# Altium PCB AIMLAB_TESTSTATION_ADC_V1.PcbDoc (part 2 of 4)
Units mm, origin at the board's own origin, x right, y up, seen from the top; angles counter-clockwise.
Board outline 175.7 x 83.5 mm, 6 copper layers (Top Layer, MidLayer1, MidLayer2, MidLayer3, MidLayer4, Bottom Layer), stack 1.507 mm thick; 326 components, 348 nets, 1330 pads, 153 vias.
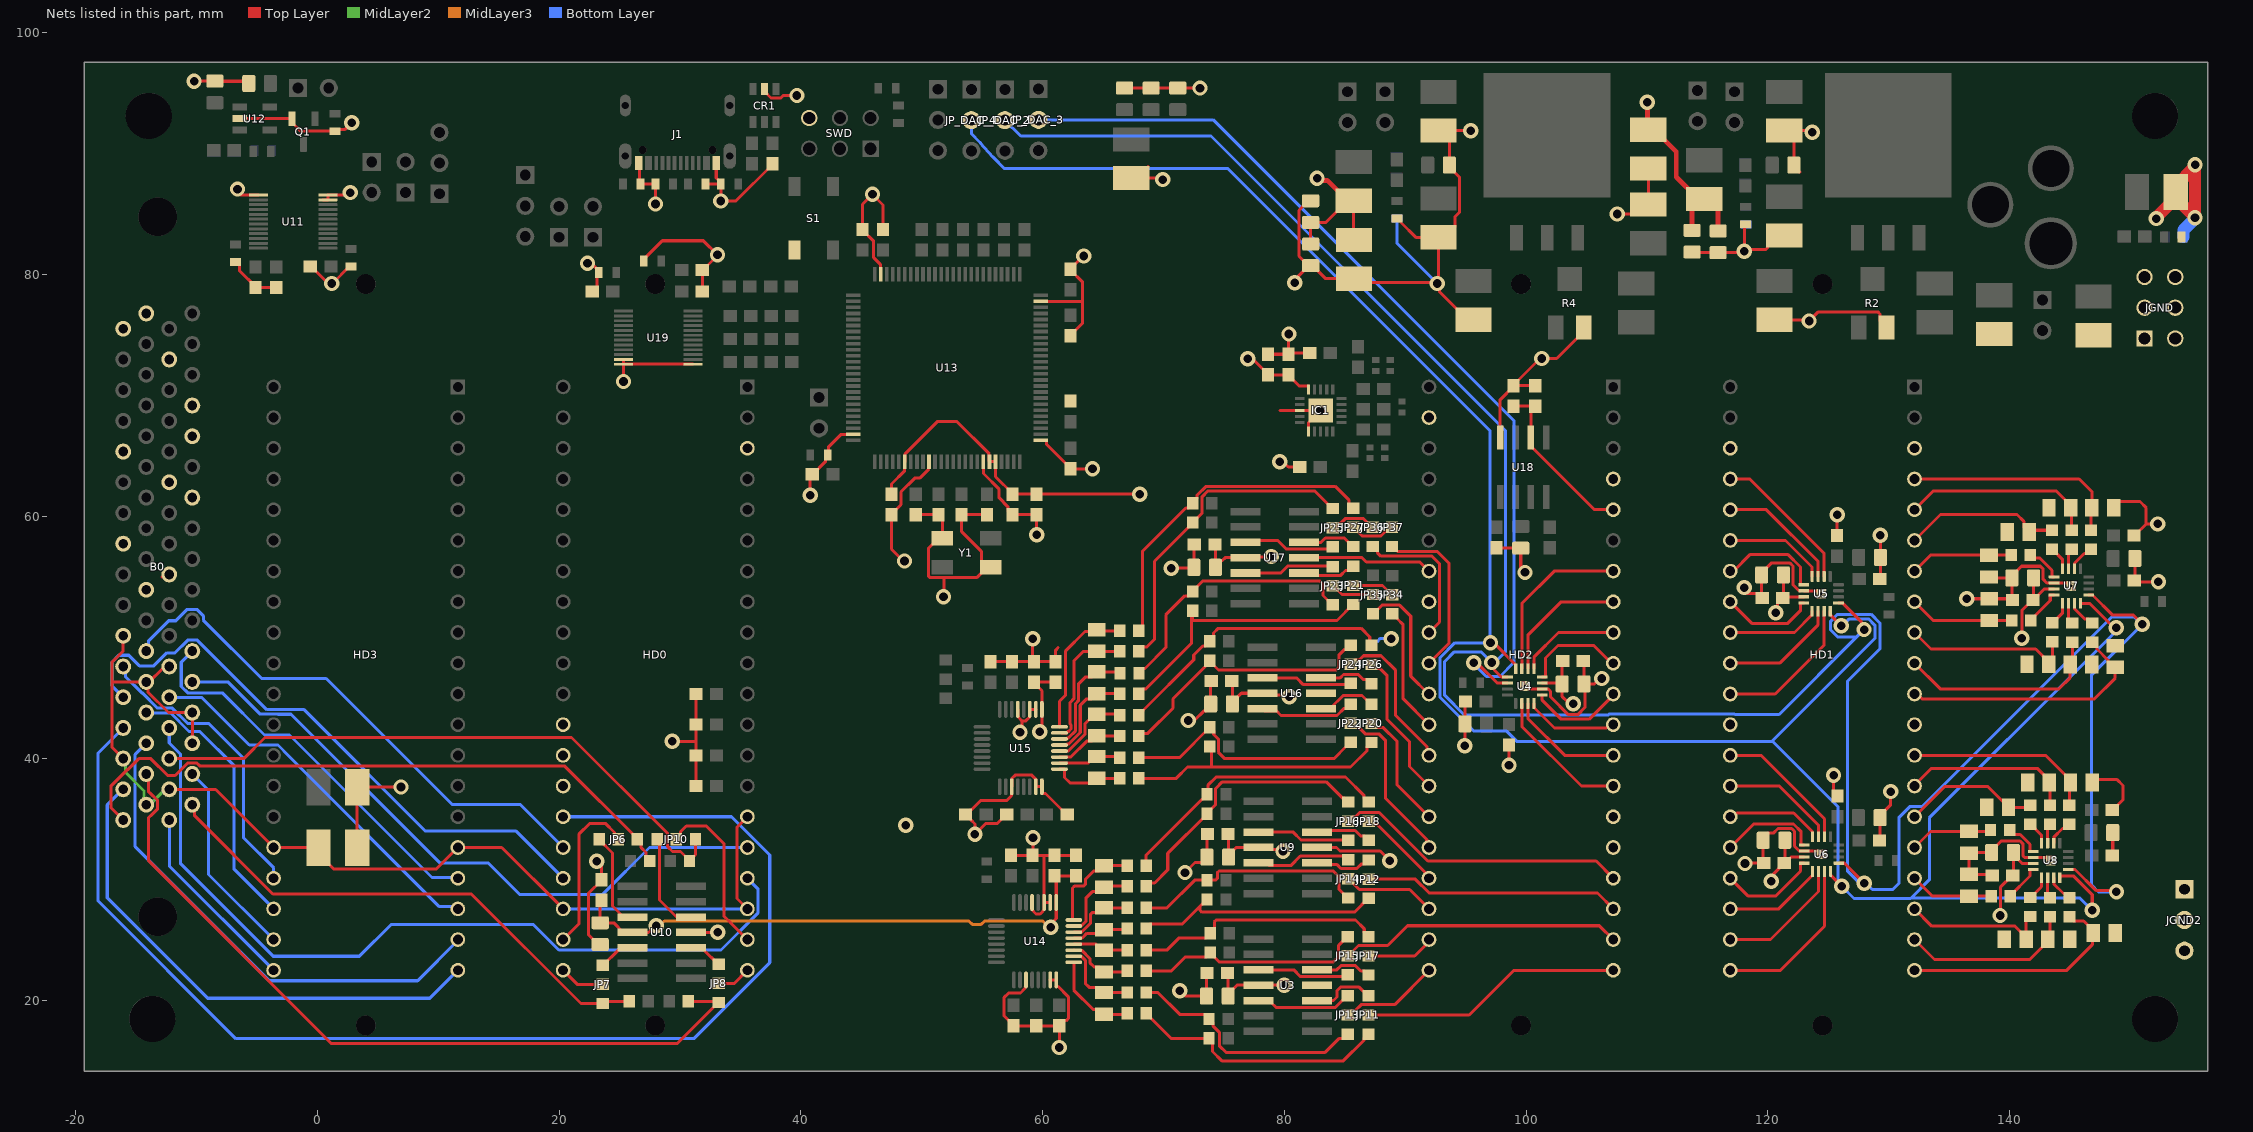
[diagram p6: the nets of this part, all layers, seen from the top]

## Via types
v1: diameter 1.27, hole 0.711, Top Layer to Bottom Layer, 153 vias

## Nets (pads, with @x,y where several pads share a name; then routed paths per layer and width w, separated by ;. In a path a pad name is that pad's centre, name@x,y a point inside that pad or via, vN(x,y) a via of type N, cw(c..) or ccw(c..) an arc to the next point about the centre after c; other vN are vias at no path point) (continued)
AGND: B0.4 B0.7 B0.9 B0.12 B0.13 B0.18 B0.35 B0.36 B0.44 B0.50 B0.53 C0.2 C1.2 C2.2 C3.2 C4.2 C5.2 C6.2 C7.2 C8.2 C9.2 C10.1 C11.2 C12.2 C13.2 C14.2 C15.1 C16.1 C17.2 C18.2 C19.2 C20.1 C21.1 C22.2 C23.2 C24.1 C25.1 C26.2 C27.2 C28.1 C29.1 C30.2 C31.2 C32.1 C33.1 C34.2 C35.2 C36.1 C37.1 C38.2 C39.2 C40.1 C41.1 C42.1 C43.1 C44.2 C45.2 C46.1 C47.1 C48.2 C49.2 C50.1 C51.1 C52.1 C53.1 C54.1 C55.2 C56.2 C57.2 C60.2 C61.1 C62.1 C63.1 C64.1 C65.1 C66.1 C67.1 C68.1 C69.1 C70.1 C71.1 C72.1 C75.2 C76.2 C77.1 C78.2 C79.2 C81.1 C82.1 C83.1 C84.1 C85.1 C86.1 C87.1 C88.1 C92.2 C93.1 C94.2 C95.2 C96.1 C97.1 C98.1 C99.1 C100.1 C101.1 C102.1 C103.1 C104.1 C105.2 C106.2 C107.2 C108.2 C109.1 C110.1 C111.2 C112.1 C113.1 C114.2 C115.2 C116.2 C117.1 C118.1 C119.1 C121.2 C122.2 C127.2 C128.1 C129.1 CR1.2 HD0.5 HD0.24 HD0.26 HD0.28 HD1.5 HD1.6 HD1.23 HD1.24 HD2.4 HD2.14 HD2.16 HD2.29 HD2.31 IC1.3 IC1.6 IC1.21 J1.A1_B12 J1.B1_A12 JGND2.1 JGND2.2 JGND2.3 JGND.1 JGND.2 JGND.3 JGND.4 JGND.5 JGND.6 L4.1 L5.1 L6.2 Q1.2 R2.3 R4.3 R5.1 R6.1 R7.2 R8.1 R10.1 R45.2 R62.1 R63.1 R64.2 R65.1 R80.2 R92.2 R93.2 R94.2 R95.2 R100.2 R101.2 R102.1 R103.1 R104.1 S1.4 SWD.6 U3.11 U4.6 U4.17 U4.18 U5.6 U5.17 U5.18 U6.6 U6.17 U6.18 U7.6 U7.17 U7.18 U8. U8.6 U8.17 U9.11 U10.11 U11.11 U11.12 U11.13 U12.2 U13.10 U13.19 U13.26 U13.49 U13.74 U13.99 U14.10 U14.11 U14.13 U14.27 U14.31 U14.32 U15.10 U15.11 U15.13 U15.27 U15.31 U15.32 U16.11 U17.11 U18.4 U19.11 U19.12 U19.13 Y1.2 Y1.4 | length 508.5
  Top Layer w0.25: B0.53@-14.152,53.945 B0.53@-13.93,53.945 ; B0.18@-12.865,55.01 -12.452,55.01 B0.18@-12.247,55.215 ; R101.2@-6.775,81.05 -6.65,81.05 -6.45,80.85 -6.45,80.35 -5.1,79 C51.1@-5.1,78.95 ; C52.1@-0.525,80.7 0.605,79.57 0.629,79.57 0.924,79.275 1.25,79.275 2.65,80.675 R7.2@2.775,80.675 ; L4.1@3.3,32.6 L5.1@3.3,37.6 3.325,37.625 v1(6.925,37.625) ; v1(23.125,31.475) 23.5,31.1 C49.2@23.5,29.95 23.5,29.9 22.438,28.838 22.438,25.397 23.23,24.605 C48.2@23.4,24.605 ; v1(25.33,71.17) U19.12@25.33,72.6 ; U19.11@25.33,73 U19.12@25.33,72.6 ; J1.B1_A12@26.6,89.25 26.662,89.187 26.662,87.563 R65.1@26.725,87.5 R64.2@27.975,87.5 v1(27.975,85.85) ; v1(29.35,41.4) 31.325,41.4 ; U10.11@30.964,25.6 v1(33.125,25.6) ; U19.13@31.07,72.6 U19.12@25.33,72.6 ; R95.2@31.325,37.705 R94.2@31.325,40.245 31.325,41.4 ; R92.2@31.325,45.325 R93.2@31.325,42.785 31.325,41.4 ; R62.1@32.125,87.5 R63.1@33.375,87.5 ; J1.A1_B12@33,89.25 33,88 33.375,87.625 R63.1@33.375,87.5 ; C129.1@37.65,89.175 37.65,89.125 34.625,86.1 v1(33.375,86.1) R63.1@33.375,87.5 ; v1(40.775,61.775) 40.775,63.325 C100.1@40.95,63.5 ; C100.1@41,63.5 42.025,64.525 42.025,64.9 R45.2@42.225,65.1 42.304,65.179 42.304,65.779 43.298,66.773 44.323,66.773 U13.99@44.35,66.8 ; C92.2@47.5,60.15 47.5,57.3 48.475,56.325 v1(48.575,56.325) ; C92.2@47.5,60.2 48.283,60.983 48.283,62.039 49.42,63.177 49.832,63.177 50.573,63.917 U13.10@50.573,64.967 ; C96.1@49.5,60.1 C96.1@49.5,60.15 C103.1@51.4,60.15 51.7,59.85 Y1.4@51.7,58.2 51.4,58.2 50.548,57.348 50.548,55.096 50.696,54.948 51.825,54.948 ; v1(51.8,53.375) 51.825,53.4 51.825,54.948 ; v1@54.512,33.613 v1(54.4,33.725) ; U13.19@55.1,64.55 55.1,63.556 56.4,62.256 56.4,61.544 57.125,60.819 57.125,60.525 C101.1@57.5,60.15 C102.1@59.5,60.15 v1(59.5,58.5) ; C77.1@55.4,60.15 C104.1@53.3,60.15 53.3,58.744 54.925,57.119 54.925,56.275 Y1.2@55.4,55.8 ; C62.1@55.675,48 C23.2@57.475,48 C21.1@59.275,48 ; Y1.2@55.7,55.8 Y1.2@55.4,55.8 ; C42.1@57.025,35.35 56.975,35.35 56.223,34.598 55.273,34.598 v1(54.4,33.725) ; C61.1@57.375,31.975 C22.2@59.175,31.975 ; U15.13@57.942,44.05 57.942,43.486 58.04,43.388 58.04,43.333 58.275,43.098 ; v1(58.125,42.15) 58.275,42.3 58.275,43.098 ; U14.27@58.615,21.685 58.615,21.102 58.527,21.013 58.527,20.958 58.162,20.594 57.188,20.594 56.823,20.229 56.823,18.677 57.575,17.925 C63.1@57.575,17.875 C32.1@59.475,17.875 C33.1@61.375,17.875 ; U14.13@59.125,28.075 59.135,28.065 59.135,27.447 59.458,27.123 59.791,27.123 60.027,27.358 60.027,27.413 60.125,27.511 U14.11@60.125,28.075 ; v1(59.175,49.9) 59.175,48.1 C21.1@59.275,48 ; v1(59.2,33.425) 59.2,32 C22.2@59.175,31.975 ; U15.10@59.442,44.05 U15.11@58.942,44.05 58.932,44.04 58.932,43.422 58.608,43.098 58.275,43.098 ; U13.26@59.85,66.3 60.294,66.3 60.322,66.273 60.322,65.978 62.3,64 C93.1@62.3,63.95 v1(64.125,63.95) ; U15.32@59.942,37.35 59.942,37.114 59.965,37.09 60.235,37.09 61.975,35.35 C43.1@62.025,35.35 ; U15.32@59.942,37.65 U15.31@59.442,37.65 59.432,37.66 59.432,38.278 59.108,38.602 57.727,38.602 57.451,38.326 57.451,37.66 U15.27@57.442,37.65 57.432,37.64 57.432,36.907 57.05,36.525 54.9,36.525 54.1,35.725 54,35.725 C64.1@53.625,35.35 53.675,35.35 54.05,34.975 54.05,34.925 54.4,34.575 v1(54.4,33.725) ; 60.125,31.975 60.125,29.475 U14.11@60.125,28.075 ; U14.31@60.615,21.685 U14.31@60.625,21.675 U14.32@61.125,21.675 ; U14.10@60.625,28.075 U14.11@60.125,28.075 ; U14.32@61.125,21.139 61.148,21.115 61.285,21.115 62.127,20.273 62.127,18.477 61.95,18.3 61.75,18.3 61.375,17.925 C33.1@61.375,17.875 ; 61.275,49.15 61.075,48.95 C20.1@61.075,48 C21.1@59.275,48 ; v1(61.375,16.075) C33.1@61.375,17.875 ; C16.1@62.775,31.975 C15.1@60.975,31.975 C22.2@59.175,31.975 ; C12.2@66.775,95.445 C13.2@68.975,95.445 C14.2@71.175,95.445 v1(73.02,95.445) ; C11.2@67.325,88 69.825,88 v1(69.95,87.875) ; C11.2@68.7,88.875 C11.2@68.7,88.975 ; v1(70.625,55.725) 72.43,55.725 C78.2@72.505,55.8 72.505,57.655 C79.2@72.55,57.7 C79.2@72.6,57.7 ; v1(71.35,20.775) 71.792,20.333 C30.2@73.555,20.333 ; v1(71.775,30.55) 72.599,31.374 73.172,31.374 73.586,31.788 C55.2@73.586,31.824 73.586,33.679 C56.2@73.631,33.724 C56.2@73.681,33.724 ; v1(72.05,43.125) 72.547,43.125 73.326,43.904 73.491,43.904 73.905,44.318 C75.2@73.905,44.483 ; C30.2@73.555,20.168 C30.2@73.555,20.333 ; C31.2@73.6,22.233 73.555,22.188 C30.2@73.555,20.333 ; C75.2@73.905,44.313 C75.2@73.905,44.483 ; C76.2@73.95,46.383 73.905,46.338 C75.2@73.905,44.483 ; C121.2@78.65,73.425 C122.2@80.35,73.425 ; v1(79.625,64.525) 79.901,64.525 80.326,64.1 C127.2@81.275,64.1 ; 79.627,68.773 IC1.3@81.273,68.773 IC1.21@83,68.773 v1(82.975,68.748) 82,67.773 IC1.6@82,67.046 ; v1(80.375,75.1) 80.35,75.075 C122.2@80.35,73.425 ; v1(80.85,79.325) 80.85,79.59 82.005,80.745 C19.2@82.005,80.75 ; U17.11@81.664,56.6 83.1,56.6 83.102,56.602 86.423,56.602 86.779,56.246 91.199,56.246 HD2.14@91.96,55.485 ; C128.1@82.1,73.525 80.45,73.525 C122.2@80.35,73.425 ; C57.2@82.175,86.12 82.005,86.12 81.213,85.328 81.213,81.542 C19.2@82.005,80.75 ; U16.11@82.198,45.229 82.353,45.383 U16.11@83.064,45.383 ; U9.11@82.745,32.624 84.301,32.624 84.599,32.326 87.924,32.326 v1(88.725,31.525) ; R8.1@89.325,84.65 89.45,84.65 89.65,84.45 89.65,84.325 90.875,83.1 C9.2@92.75,83.1 ; C6.2@92.75,91.925 v1(95.425,91.925) ; C6.2@92.77,91.925 93.645,91.05 C10.1@93.645,89.075 93.645,88.905 94.502,88.048 94.502,85.196 94.125,84.819 94.125,83.975 93.25,83.1 C9.2@92.75,83.1 ; v1(94.93,41.045) 94.93,44.78 C25.1@94.975,44.825 ; C5.2@95.65,76.275 95.15,76.275 92.845,78.58 92.845,79.08 v1(92.65,79.275) ; C112.1@97.55,57.425 97.595,57.38 C113.1@99.35,57.38 ; U18.4@97.845,66.539 97.845,69.67 C110.1@98.95,70.775 ; v1(98.575,39.425) C105.2@98.575,41.1 ; C113.1@99.35,57.275 99.455,57.38 C113.1@99.55,57.38 99.55,55.725 v1(99.9,55.375) ; U4.18@99.885,45.975 100.135,45.725 U4.6@101.32,45.725 101.325,45.72 101.83,45.72 102.012,45.538 102.012,45.088 103.487,43.613 104.267,43.613 104.85,44.196 104.85,45.895 C17.2@104.81,45.935 ; C109.1@100.75,70.825 C110.1@98.95,70.825 98.95,70.875 101.15,73.075 102.525,73.075 104.75,75.3 R4.3@104.75,75.65 ; C18.2@104.725,48.05 104.77,48.005 104.77,45.975 C17.2@104.81,45.935 ; v1(106.25,46.6) 106.082,46.6 105.632,46.15 105.025,46.15 C17.2@104.81,45.935 ; v1(107.525,85.025) 109.325,85.025 C4.2@110.1,85.8 C114.2@110.1,88.8 ; C115.2@113.725,81.88 113.75,81.855 115.85,81.855 C116.2@115.875,81.83 117.93,81.83 v1(118.05,81.95) ; v1(118.05,54.125) 118.196,53.979 118.196,53.65 119.15,53.65 C27.2@119.525,53.275 119.48,53.32 C26.2@119.48,55.175 119.48,55.345 120.272,56.137 121.835,56.137 122.062,55.91 122.062,54.356 122.518,53.9 122.551,53.9 122.586,53.865 122.65,53.865 U5.6@122.655,53.86 ; v1(118.1,31.3) 118.125,31.325 C35.2@119.65,31.325 119.605,31.37 C34.2@119.605,33.225 119.605,33.39 120.019,33.804 120.447,33.804 120.83,34.187 121.96,34.187 122.187,33.96 122.187,32.731 122.588,32.33 122.995,32.33 U6.6@123,32.325 U6.17@124.185,32.325 ; R6.1@118.15,84.175 118.05,84.075 v1(118.05,81.95) ; C2.2@120.55,76.275 123.3,76.275 v1(123.4,76.175) 124.127,76.902 129.129,76.902 129.275,76.756 129.275,76.175 R2.3@129.8,75.65 ; C7.2@121.85,83.25 120.85,83.25 119.975,82.375 119.975,82.246 119.829,82.1 118.2,82.1 v1(118.05,81.95) ; C8.2@122.629,88.496 122.559,88.496 122.145,88.91 C8.2@122.145,89.075 122.145,91.13 C3.2@121.35,91.925 123.525,91.925 v1(123.675,91.775) ; U5.6@122.965,53.86 U5.17@124.15,53.86 ; v1(125.425,38.6) 125.425,37.2 C107.2@125.75,36.875 ; C106.2@125.725,58.425 v1(125.725,60.15) ; C29.1@129.25,54.825 129.295,54.87 C28.1@129.295,56.625 v1@129.295,58.445 ; C37.1@129.6,33.575 C37.1@129.225,33.2 129.27,33.245 129.27,35.27 130.155,36.155 130.155,37.245 v1(130.15,37.25) ; v1(136.45,53.2) C69.1@138.3,53.2 140.125,53.2 C39.2@140.225,53.1 140.18,53.145 C38.2@140.18,54.925 ; C68.1@138.275,55 138.35,54.925 C38.2@140.18,54.925 ; C45.2@138.55,30.3 138.45,30.4 C85.1@136.625,30.4 C84.1@136.625,32.15 136.675,32.2 C44.2@138.505,32.2 138.505,32.37 139.297,33.162 140.86,33.162 141.087,32.935 141.087,31.946 141.233,31.8 U8.6@141.955,31.8 143.099,31.8 143.349,31.55 U8.@143.39,31.55 ; U7.18@145.1,54.26 145.059,54.26 144.809,54.51 U7.6@143.665,54.51 143.065,54.51 142.762,54.813 142.762,55.66 142.535,55.887 140.972,55.887 140.18,55.095 C38.2@140.18,54.925 ; C81.1@146.825,38 147.087,38.262 148.842,38.262 149.362,37.742 149.362,36.562 148.525,35.725 C111.2@148.475,35.725 ; C47.1@148.475,31.95 148.52,31.995 C46.1@148.52,33.85 ; C65.1@148.6,60.725 148.6,60.807 149.03,61.237 150.767,61.237 151.287,60.717 151.287,59.387 ; C108.2@150.275,58.425 150.325,58.425 151.287,59.387 ; C40.1@150.345,56.525 150.345,54.745 C41.1@150.3,54.7 150.4,54.6 v1(152.3,54.6) ; v1(152.237,59.387) 151.287,59.387 ; 51.825,54.948 54.548,54.948 Y1.2@55.4,55.8 ; C19.2@82.005,80.75 C19.2@82.175,80.75 82.345,80.75 83.42,79.675 C60.2@85.75,79.675 86.075,79.35 92.575,79.35 v1(92.65,79.275) ; v1(92.65,79.275) 92.75,79.375 C9.2@92.75,83.1
  Top Layer w0.254: v1(-10.195,96.02) C53.1@-8.475,96.02 -8.462,96.007 -5.852,96.007 C54.1@-5.67,95.825 ; v1(-6.6,87.089) -6.6,86.85 -6.35,86.6 U11.13@-4.87,86.6 ; U12.2@-6.43,92.925 -2.115,92.925 Q1.2@-2.1,92.91 -2.1,92.595 -1.38,91.875 R10.1@1.475,91.875 1.631,92.031 2.306,92.031 v1(2.85,92.575) ; C51.1@-5.1,78.95 C50.1@-3.4,78.95 ; U11.11@0.493,86.193 0.5,86.2 U11.11@0.87,86.2 U11.12@0.87,86.6 0.877,86.607 2.532,86.607 v1(2.725,86.8) ; v1(22.35,80.95) 22.65,80.95 23.275,80.325 R80.2@23.275,80.2 23.125,80.05 23.125,78.973 C119.1@22.75,78.6 C119.1@22.75,78.6 ; R100.2@27,81.15 27,81.275 28.539,82.814 31.936,82.814 v1(33.1,81.65) 33.1,81.6 31.9,80.4 C118.1@31.85,80.4 31.85,78.95 32.2,78.6 C117.1@31.85,78.6 ; CR1.2@37,95.575 CR1.2@37,95.365 37,95.156 37.533,94.622 38.335,94.622 38.537,94.825 v1(39.675,94.825) v1@39.7,94.85 ; U13.74@46.6,80.05 46.575,80.075 46.575,80.866 46.024,81.417 46.024,82.776 45.1,83.7 C97.1@45.1,83.75 45.1,85.825 v1(45.925,86.65) 46.8,85.775 C95.2@46.8,83.75 ; U13.49@59.85,77.8 63.3,77.8 63.314,77.814 ; C94.2@62.3,74.95 62.3,75 63.314,76.014 63.314,77.814 ; C99.1@62.3,80.45 62.3,80.4 63.314,79.386 63.314,77.814 ; C99.1@62.3,80.5 63.35,81.55 v1(63.4,81.55)
  Top Layer w1: v1(152.125,84.65) 152.177,84.702 152.177,84.802 L6.2@153.725,86.35 ; L6.2@153.725,86.85 L6.2@153.725,86.35 ; L6.2@153.725,87.35 155.33,88.955 v1(155.33,89.1) 155.327,89.098 155.327,84.727 v1(155.325,84.725) 155.325,84.75 L6.2@153.725,86.35
  MidLayer2 w0.25: v1(51.8,53.375) v1@51.925,53.5
  Bottom Layer w0.25: 87.75,49.675 87.75,49.754 87.896,49.9 v1(88.85,49.9) ; R104.1@89.3,84.65 89.3,82.625 v1(92.65,79.275) ; v1(118.05,81.95) 118.05,84.025 R103.1@118.175,84.15
  Bottom Layer w1: R102.1@154.371,83.138 154.371,83.697 155.325,84.652 v1(155.325,84.725)
  other v1: 48.675,34.475 129.295,58.45 101.275,73.075 1.2,79.275
AIN1N_B: JP11.3 R32.2 R37.1 | length 21.5
  Top Layer w0.25: R37.1@68.565,18.925 68.565,18.885 70.617,16.833 R32.2@73.76,16.833 74.05,16.543 74.05,15.75 74.825,14.975 84.875,14.975 86.565,16.665 86.565,16.842 86.91,17.187 JP11.3@86.95,17.187
AIN1N_F: C58.2 R37.2 U14.1 | length 7.6
  Top Layer w0.25: U14.1@62.575,23.125 62.575,20.825 64.165,19.235 64.665,19.235 C58.2@65.075,18.825 66.885,18.825 R37.2@66.985,18.925
AIN1N_I: HD2.39 JP11.2 | length 21.8
  Top Layer w0.25: JP11.2@86.95,18.767 95.287,18.767 98.985,22.465 HD2.39@107.2,22.465
AIN1N_R: JP11.1 U3.10 | length 5.3
  Top Layer w0.25: U3.10@82.73,19.963 84.063,19.963 84.349,20.249 84.349,20.783 84.636,21.069 86.188,21.069 86.91,20.347 JP11.1@86.95,20.347
AIN1P_B: JP13.3 R31.1 R39.1 | length 20.2
  Top Layer w0.25: R39.1@68.565,20.625 69.525,20.625 71.332,18.818 73.415,18.818 73.76,18.473 R31.1@73.76,18.433 74.105,18.088 74.105,17.845 74.618,17.332 74.618,16.219 75.162,15.675 83.375,15.675 84.542,16.842 84.905,16.842 JP13.3@85.25,17.187
AIN1P_F: C58.1 R39.2 U14.2 | length 6.8
  Top Layer w0.25: U14.2@62.575,23.625 62.585,23.615 63.203,23.615 63.527,23.292 63.527,21.373 63.845,21.055 64.645,21.055 C58.1@65.075,20.625 R39.2@66.985,20.625
AIN1P_I: HD2.40 JP13.2 | length 8.2
  Top Layer w0.25: JP13.2@85.25,18.767 85.595,19.112 85.837,19.112 86.35,19.625 89.12,19.625 HD2.40@91.96,22.465
AIN1P_R: JP13.1 U3.5 | length 8.1
  Top Layer w0.25: U3.5@77.802,19.963 77.956,19.809 78.891,19.809 79.3,19.4 84.225,19.4 84.827,20.002 84.905,20.002 JP13.1@85.25,20.347
AIN2N_B: JP15.3 R30.1 R38.1 | length 19.1
  Top Layer w0.25: R38.1@68.565,22.425 70.651,22.425 71.774,23.548 73.515,23.548 R30.1@73.86,23.893 ; R30.1@73.86,23.933 R30.1@73.86,23.893 ; JP15.3@85.25,25.247 85.21,25.247 84.488,24.525 84.488,23.596 84.042,23.15 74.603,23.15 R30.1@73.86,23.893
AIN2N_F: C59.2 R38.2 U14.3 | length 5.4
  Top Layer w0.25: U14.3@62.575,24.125 62.585,24.115 63.236,24.115 63.904,23.448 63.904,23.096 64.245,22.755 64.645,22.755 C59.2@65.075,22.325 66.885,22.325 R38.2@66.985,22.425
AIN2N_I: HD2.37 JP15.2 | length 23.5
  Top Layer w0.25: JP15.2@85.25,23.667 85.29,23.667 86.131,24.508 88.545,24.508 90.187,26.15 106.055,26.15 HD2.37@107.2,25.005
AIN2N_R: JP15.1 U3.3 | length 7.7
  Top Layer w0.25: U3.3@77.802,22.503 80.772,22.503 81.335,21.94 85.103,21.94 JP15.1@85.25,22.087
AIN2P_B: JP17.3 R29.2 R40.1 | length 20.6
  Top Layer w0.25: R40.1@68.565,24.125 70.275,24.125 71.298,25.148 73.515,25.148 73.86,25.493 R29.2@73.86,25.533 74.205,25.878 74.205,26.479 74.351,26.625 85.875,26.625 86.605,25.895 86.605,25.575 JP17.3@86.95,25.23
AIN2P_F: C59.1 R40.2 U14.4 | length 4.6
  Top Layer w0.25: U14.4@62.575,24.625 64.395,24.625 64.895,24.125 C59.1@65.075,24.125 R40.2@66.985,24.125
AIN2P_I: HD2.38 JP17.2 | length 5.7
  Top Layer w0.25: JP17.2@86.95,23.65 90.775,23.65 91.96,24.835 HD2.38@91.96,25.005
AIN2P_R: JP17.1 U3.12 | length 4.7
  Top Layer w0.25: U3.12@82.73,22.503 84.33,22.503 84.677,22.85 85.88,22.85 86.315,22.415 86.605,22.415 JP17.1@86.95,22.07
AIN3N_B: JP12.3 R36.2 R41.1 | length 20.9
  Top Layer w0.25: R41.1@68.565,25.925 68.565,25.965 68.91,26.31 71.577,26.31 73.025,27.758 ; R36.2@73.591,28.324 73.206,27.939 73.025,27.758 ; JP12.3@86.981,28.424 86.941,28.424 85.792,27.275 73.171,27.275 73.025,27.421 73.025,27.758
AIN3N_F: C73.2 R41.2 U14.5 | length 4.7
  Top Layer w0.25: U14.5@62.575,25.125 62.585,25.135 63.269,25.135 63.66,25.525 64.775,25.525 C73.2@65.075,25.825 66.885,25.825 R41.2@66.985,25.925
AIN3N_I: HD2.35 JP12.2 | length 21.2
  Top Layer w0.25: JP12.2@86.981,30.004 90.823,30.004 91.976,28.85 105.895,28.85 HD2.35@107.2,27.545
AIN3N_R: JP12.1 U9.10 | length 4.7
  Top Layer w0.25: U9.10@82.745,31.354 82.872,31.227 84.322,31.227 84.667,30.882 85.99,30.882 86.347,31.239 86.596,31.239 86.941,31.584 JP12.1@86.981,31.584
AIN3P_B: JP14.3 R35.1 R43.1 | length 19.8
  Top Layer w0.25: R43.1@68.565,27.625 70.275,27.625 72.574,29.924 R35.1@73.591,29.924 74.303,29.924 74.449,30.07 74.449,30.538 74.597,30.686 84.039,30.686 84.519,30.206 84.519,29.166 85.241,28.444 JP14.3@85.281,28.444
AIN3P_F: C73.1 R43.2 U14.6 | length 5.7
  Top Layer w0.25: U14.6@62.575,25.625 62.585,25.635 63.236,25.635 63.975,26.373 63.975,27.112 64.121,27.258 64.708,27.258 C73.1@65.075,27.625 R43.2@66.985,27.625
AIN3P_I: HD2.36 JP14.2 | length 7.7
  Top Layer w0.25: JP14.2@85.281,30.024 85.321,30.024 86.199,29.146 90.359,29.146 HD2.36@91.96,27.545
AIN3P_R: JP14.1 U9.5 | length 8
  Top Layer w0.25: U9.5@77.817,31.354 78.529,31.354 78.758,31.124 80.524,31.124 81.317,31.917 84.968,31.917 JP14.1@85.281,31.604
AIN4N_B: JP16.3 R34.1 R42.1 | length 22.6
  Top Layer w0.25: R42.1@68.565,29.425 68.829,29.689 69.264,29.689 70.35,30.775 70.35,32.143 73.591,35.384 R34.1@73.591,35.424 ; R34.1@73.591,35.464 74.313,36.186 74.313,37.502 74.861,38.05 83.455,38.05 84.776,36.729 84.936,36.729 JP16.3@85.281,36.384
AIN4N_F: C74.2 R42.2 U14.7 | length 6.9
  Top Layer w0.25: U14.7@62.575,26.125 62.585,26.135 63.203,26.135 63.575,26.506 63.575,28.425 64.115,28.965 64.715,28.965 65.175,29.425 R42.2@66.985,29.425
AIN4N_I: HD2.33 JP16.2 | length 24.5
  Top Layer w0.25: JP16.2@85.281,34.804 85.626,35.149 85.849,35.149 86.226,35.526 87.841,35.526 91.866,31.5 105.785,31.5 HD2.33@107.2,30.085
AIN4N_R: JP16.1 U9.3 | length 7.7
  Top Layer w0.25: U9.3@77.817,33.894 80.731,33.894 81.375,33.25 85.255,33.25 JP16.1@85.281,33.224
AIN4P_B: JP18.3 R33.2 R44.1 | length 23.5
  Top Layer w0.25: R44.1@68.565,31.125 68.565,31.998 73.206,36.639 73.246,36.639 73.684,37.076 R33.2@73.684,37.116 ; R33.2@73.591,37.024 73.663,37.095 73.663,37.763 74.35,38.45 85.055,38.45 86.596,36.909 86.596,36.729 86.941,36.384 JP18.3@86.981,36.384
AIN4P_F: C74.1 R44.2 U14.8 | length 8.3
  Top Layer w0.25: U14.8@62.575,26.625 62.498,26.625 62.475,26.648 62.475,29.279 62.621,29.425 63.381,29.425 63.527,29.571 63.527,29.977 64.245,30.695 64.645,30.695 C74.1@65.075,31.125 R44.2@66.985,31.125
AIN4P_I: HD2.34 JP18.2 | length 7
  Top Layer w0.25: JP18.2@86.981,34.804 87.279,34.506 87.694,34.506 91.96,30.24 HD2.34@91.96,30.085
AIN4P_R: JP18.1 U9.12 | length 4.6
  Top Layer w0.25: U9.12@82.745,33.894 82.875,34.024 85.848,34.024 86.303,33.569 86.636,33.569 JP18.1@86.981,33.224
AIN5N_B: JP20.3 R49.2 R54.1 | length 22.4
  Top Layer w0.25: R54.1@67.965,38.35 71.057,38.35 71.982,39.275 73.975,39.275 ; R49.2@73.81,40.983 73.975,40.818 73.975,39.275 ; JP20.3@87.2,41.303 87.191,41.303 86.846,40.958 86.846,40.646 85.475,39.275 73.975,39.275
AIN5N_F: C80.2 R54.2 U15.1 | length 6
  Top Layer w0.25: U15.1@61.392,39.1 61.794,39.1 61.817,39.077 61.817,38.408 62.275,37.95 64.075,37.95 C80.2@64.475,38.35 R54.2@66.385,38.35
AIN5N_I: HD2.30 JP20.2 | length 10.1
  Top Layer w0.25: JP20.2@87.2,42.883 87.545,42.538 88.187,42.538 89.3,41.425 89.3,37.825 HD2.30@91.96,35.165
AIN5N_R: JP20.1 U16.10 | length 4.9
  Top Layer w0.25: U16.10@83.064,44.113 83.775,44.113 84.867,45.205 86.418,45.205 87.16,44.463 JP20.1@87.2,44.463
AIN5P_B: JP22.3 R48.1 R56.1 | length 21
  Top Layer w0.25: R56.1@67.965,40.05 71.317,40.05 73.81,42.543 R48.1@73.81,42.583 74.155,42.238 74.155,41.974 74.532,41.597 74.532,40.505 75.062,39.975 84.1,39.975 85.103,40.978 85.155,40.978 JP22.3@85.5,41.323
AIN5P_F: C80.1 R56.2 U15.2 | length 5.3
  Top Layer w0.25: U15.2@61.392,39.6 63.745,39.6 64.295,40.15 C80.1@64.475,40.15 66.285,40.15 R56.2@66.385,40.05
AIN5P_I: HD2.32 JP22.2 | length 13.8
  Top Layer w0.25: JP22.2@85.5,42.903 85.845,42.558 86.142,42.558 86.675,42.025 87.814,42.025 88.375,41.464 88.375,36.675 91.775,33.275 91.775,32.81 HD2.32@91.96,32.625
AIN5P_R: JP22.1 U16.5 | length 7.9
  Top Layer w0.25: U16.5@78.184,44.113 78.37,43.927 79.348,43.927 79.725,43.55 84.357,43.55 84.946,44.138 85.155,44.138 JP22.1@85.5,44.483
AIN6N_B: JP24.3 R47.1 R55.1 | length 22.4
  Top Layer w0.25: R55.1@67.965,41.85 68.154,42.039 68.664,42.039 70.775,44.15 70.775,44.925 73.465,47.615 73.465,47.738 73.79,48.063 R47.1@73.81,48.083 ; R47.1@73.81,48.043 74.553,47.3 84.298,47.3 84.505,47.508 84.505,48.53 84.993,49.018 85.155,49.018 JP24.3@85.5,49.363
AIN6N_F: C89.2 R55.2 U15.3 | length 5.7
  Top Layer w0.25: U15.3@61.392,40.1 62.325,40.1 63.645,41.42 64.045,41.42 C89.2@64.475,41.85 R55.2@66.385,41.85
AIN6N_I: HD2.26 JP24.2 | length 12.7
  Top Layer w0.25: JP24.2@85.5,47.783 85.839,48.122 86.172,48.122 86.535,48.485 87.99,48.485 89.2,47.275 89.2,43.55 91.786,40.964 91.786,40.419 HD2.26@91.96,40.245
AIN6N_R: JP24.1 U16.3 | length 7.6
  Top Layer w0.25: U16.3@78.136,46.653 80.997,46.653 81.56,46.09 85.387,46.09 JP24.1@85.5,46.203
AIN6P_B: JP26.3 R46.2 R57.1 | length 23.6
  Top Layer w0.25: R57.1@67.965,43.55 68.31,43.895 68.31,43.96 72.5,48.15 72.5,48.55 73.248,49.298 73.465,49.298 73.81,49.643 R46.2@73.81,49.683 74.139,50.012 74.139,50.364 74.525,50.75 86.35,50.75 87.058,50.042 87.058,49.484 JP26.3@87.2,49.343
AIN6P_F: C89.1 R57.2 U15.4 | length 6.8
  Top Layer w0.25: U15.4@61.392,40.6 61.401,40.61 62.119,40.61 63.488,41.978 63.488,42.843 64.295,43.65 66.285,43.65 R57.2@66.385,43.55
AIN6P_I: HD2.28 JP26.2 | length 12.3
  Top Layer w0.25: JP26.2@87.2,47.763 87.545,47.418 87.932,47.418 88.475,46.875 88.475,43.25 90.35,41.375 90.35,39.315 HD2.28@91.96,37.705
AIN6P_R: JP26.1 U16.12 | length 4.6
  Top Layer w0.25: U16.12@83.064,46.653 84.614,46.653 84.886,46.925 86.114,46.925 86.511,46.528 86.855,46.528 JP26.1@87.2,46.183
AIN7N_B: JP21.3 R53.2 R58.1 | length 23.5
  Top Layer w0.25: R58.1@67.965,45.35 67.965,45.39 68.31,45.735 68.535,45.735 72.3,49.5 72.3,51.405 72.3,52.09 R53.2@72.41,52.2 72.41,52.09 72.41,51.405 72.413,51.402 84.342,51.402 85.66,52.72 JP21.3@85.7,52.72
AIN7N_F: C90.2 R58.2 U15.5 | length 8.1
  Top Layer w0.25: U15.5@61.392,41.1 61.955,41.1 62.053,41.198 62.175,41.198 63.111,42.134 63.111,44.386 63.645,44.92 64.045,44.92 C90.2@64.475,45.35 R58.2@66.385,45.35
AIN7N_I: JP21.2 JP34.2 | length 3.5
  Top Layer w0.25: JP21.2@85.7,54.3 88.115,54.3 88.885,53.53 JP34.2@88.925,53.53
AIN7N_R: JP21.1 U17.10 | length 4.4
  Top Layer w0.25: U17.10@81.664,55.33 82.375,55.33 82.567,55.138 84.663,55.138 85.06,55.535 85.355,55.535 JP21.1@85.7,55.88
AIN7NV_I: HD2.24 JP34.3 | length 10.4
  Top Layer w0.25: JP34.3@88.925,51.95 88.965,51.95 89.31,51.605 89.31,51.565 89.825,51.05 89.825,44.92 HD2.24@91.96,42.785
AIN7P_B: JP23.3 R52.1 R60.1 | length 22.2
  Top Layer w0.25: R60.1@67.975,47.05 67.975,47.09 68.32,47.435 68.46,47.435 70.193,49.168 70.193,51.868 71.762,53.437 72.065,53.437 72.41,53.782 R52.1@72.41,53.8 ; R52.1@72.41,53.84 73.245,54.675 82.925,54.675 83.187,54.413 83.187,53.473 83.96,52.7 JP23.3@84,52.7
AIN7P_F: C90.1 R60.2 U15.6 | length 9.5
  Top Layer w0.25: U15.6@61.392,41.6 61.955,41.6 62.053,41.698 62.142,41.698 62.734,42.29 62.734,44.542 62.952,44.76 62.952,46.127 63.565,46.74 64.065,46.74 C90.1@64.475,47.15 66.295,47.15 R60.2@66.395,47.05
AIN7P_I: JP23.2 JP35.2 | length 3.6
  Top Layer w0.25: JP23.2@84,54.28 84.04,54.28 84.77,53.55 JP35.2@87.325,53.55
AIN7P_R: JP23.1 U17.5 | length 7.5
  Top Layer w0.25: U17.5@76.736,55.33 79.705,55.33 80.275,55.9 83.96,55.9 JP23.1@84,55.86
AIN7PV_I: HD2.22 JP35.3 | length 10.9
  Top Layer w0.25: JP35.3@87.325,51.97 87.365,51.97 88.067,52.672 89.539,52.672 90.45,51.761 90.45,46.8 91.925,45.325 HD2.22@91.96,45.325
AIN8N_B: JP25.3 R51.1 R59.1 | length 26.7
  Top Layer w0.25: R59.1@67.965,48.85 67.965,48.868 68.31,49.213 68.613,49.213 69.25,49.85 69.25,56.3 72.41,59.46 R51.1@72.41,59.5 73.2,60.29 73.2,61.646 73.679,62.125 82.495,62.125 83.96,60.66 JP25.3@84,60.66
AIN8N_F: C91.2 R59.2 U15.7 | length 10.8
  Top Layer w0.25: U15.7@61.575,42.1 61.955,42.1 62.053,42.198 62.108,42.198 62.344,42.433 62.344,42.767 62.275,42.835 62.275,44.616 62.575,44.916 62.575,48.05 63.375,48.85 C91.2@64.475,48.85 R59.2@66.385,48.85
AIN8N_I: JP25.2 JP36.2 | length 3.9
  Top Layer w0.25: JP25.2@84,59.08 84.345,59.425 84.625,59.425 85.022,59.822 86.538,59.822 87.26,59.1 JP36.2@87.3,59.1
AIN8N_R: JP25.1 U17.3 | length 7.7
  Top Layer w0.25: U17.3@76.736,57.87 76.866,58 79.475,58 80.175,57.3 83.8,57.3 JP25.1@84,57.5
AIN8NV_I: HD2.18 JP36.3 | length 12.3
  Top Layer w0.25: JP36.3@87.3,57.52 87.34,57.52 87.685,57.175 87.685,57.015 87.977,56.723 92.202,56.723 92.822,56.103 92.822,51.267 HD2.18@91.96,50.405
AIN8P_B: JP27.3 R50.2 R61.1 | length 27.5
  Top Layer w0.25: R61.1@67.965,50.55 68.275,50.86 68.275,57.15 71.84,60.715 72.065,60.715 72.41,61.06 R50.2@72.41,61.1 ; R50.2@72.41,61.14 72.755,61.485 72.755,61.735 73.522,62.502 84.198,62.502 85.355,61.345 85.355,61.025 JP27.3@85.7,60.68
AIN8P_F: C91.1 R61.2 U15.8 | length 11.7
  Top Layer w0.25: U15.8@61.392,42.6 61.392,44.71 61.875,45.194 61.875,48.85 63.511,50.486 64.311,50.486 C91.1@64.475,50.65 64.575,50.55 R61.2@66.385,50.55
AIN8P_I: JP27.2 JP37.2 | length 3.8
  Top Layer w0.25: JP27.2@85.7,59.1 85.74,59.1 86.462,58.378 87.953,58.378 88.33,58.755 88.555,58.755 JP37.2@88.9,59.1
AIN8P_R: JP27.1 U17.12 | length 4.5
  Top Layer w0.25: U17.12@81.664,57.87 83.034,57.87 83.386,58.222 84.958,58.222 85.66,57.52 JP27.1@85.7,57.52
AIN8PV_I: HD2.20 JP37.3 | length 14.2
  Top Layer w0.25: JP37.3@88.9,57.52 88.94,57.52 89.36,57.1 92.65,57.1 93.6,56.15 93.6,49.505 HD2.20@91.96,47.865
AVDD: C15.2 C16.2 C17.1 C18.1 C20.2 C21.2 C26.1 C27.1 C30.1 C31.1 C34.1 C35.1 C38.1 C39.1 C44.1 C45.1 C48.1 C49.1 C55.1 C56.1 C75.1 C76.1 C78.1 C79.1 C114.1 C115.1 C116.1 C121.1 C122.1 HD2.7 IC1.20 L3.1 U3.4 U4.7 U5.7 U6.7 U7.7 U8.7 U9.4 U10.4 U14.9 U15.9 U16.4 U17.4 | length 135.7
  Top Layer w0.25: C49.1@23.5,28.25 23.4,28.15 C48.1@23.4,26.395 24.53,26.395 25.325,25.6 27.402,25.6 27.952,26.15 v1(28.05,26.15) ; v1(59.75,42.2) 59.932,42.382 59.932,44.04 U15.9@59.942,44.05 59.942,45.583 59.275,46.25 C21.2@59.275,46.3 C20.2@61.075,46.3 ; v1(60.675,26.025) 60.675,26.301 61.125,26.751 U14.9@61.125,28.075 61.125,30.125 C15.2@60.975,30.275 C16.2@62.775,30.275 ; C79.1@74.25,57.7 74.295,57.655 C78.1@74.295,55.965 ; C78.1@74.295,55.8 C78.1@74.295,55.965 ; C31.1@75.3,22.233 75.345,22.188 C30.1@75.345,20.498 ; C56.1@75.331,33.724 75.376,33.679 C55.1@75.376,31.989 ; C30.1@75.345,20.333 C30.1@75.345,20.498 ; C55.1@75.376,31.824 C55.1@75.376,31.989 ; C76.1@75.65,46.383 75.695,46.338 C75.1@75.695,44.648 ; C75.1@75.695,44.483 C75.1@75.695,44.648 ; v1(76.975,73.05) 77.17,72.855 77.57,72.855 78.65,71.775 C121.1@78.65,71.725 C122.1@80.35,71.725 80.35,71.675 81.244,70.781 81.998,70.781 82,70.779 IC1.20@82,70.5 ; v1(78.9,56.7) 78.85,56.65 76.786,56.65 76.736,56.6 75.095,56.6 74.874,56.379 74.709,56.379 C78.1@74.295,55.965 ; v1(79.881,32.324) 79.731,32.474 77.967,32.474 77.817,32.624 76.012,32.624 C55.1@75.376,31.989 ; v1(79.983,21.233) 76.08,21.233 C30.1@75.345,20.498 ; v1(80.4,45.1) 80.258,45.242 78.278,45.242 78.136,45.383 76.43,45.383 C75.1@75.695,44.648 ; U4.7@101.32,46.225 102.905,46.225 C17.1@102.98,46.15 ; C18.1@103.025,48.05 102.98,48.005 C17.1@102.98,46.15 ; v1(103.9,44.5) 103.705,44.695 103.388,44.695 102.98,45.103 C17.1@102.98,46.15 ; v1(120.275,29.825) 120.47,30.02 120.47,30.445 120.925,30.9 120.925,30.95 121.3,31.325 C35.1@121.35,31.325 121.395,31.37 C34.1@121.395,33.225 ; v1(120.65,52.05) 120.8,52.2 120.8,52.9 121.175,53.275 C27.1@121.225,53.275 ; C26.1@121.27,55.175 121.27,53.32 C27.1@121.225,53.275 ; C35.1@121.4,31.325 121.9,31.825 U6.7@123,31.825 ; U5.7@122.965,53.36 121.31,53.36 C27.1@121.225,53.275 ; v1(139.2,27) 139.225,27.025 139.225,29.325 140.2,30.3 C45.1@140.25,30.3 140.295,30.345 C44.1@140.295,32.035 ; C44.1@140.295,32.2 C44.1@140.295,32.035 ; v1(141,49.925) 141,52.225 141.875,53.1 C39.1@141.925,53.1 ; U8.7@141.955,31.3 141.03,31.3 C44.1@140.295,32.035 ; C38.1@141.97,54.925 141.97,53.145 C39.1@141.925,53.1 ; U7.7@143.665,54.01 142.85,54.01 142.35,53.51 142.35,53.475 141.975,53.1 C39.1@141.925,53.1
  Top Layer w0.4: v1(110.025,94.275) 110.025,92.075 C114.1@110.1,92 110.6,92 112.412,90.187 112.412,88.088 114.225,86.275 L3.1@114.725,86.275 ; C115.1@113.725,83.67 113.725,85.475 114.525,86.275 L3.1@114.725,86.275 ; C116.1@115.875,83.62 115.875,85.475 115.075,86.275 L3.1@114.725,86.275
  MidLayer3 w0.25: v1(28.05,26.15) 28.306,26.15 28.706,26.55 53.896,26.55 54.183,26.263 54.917,26.263 55.204,26.55 60.019,26.55 60.544,26.025 v1(60.675,26.025)
AVDD3: C19.1 C57.1 C60.1 C92.1 C101.2 C102.2 C109.2 C110.2 HD2.9 L2.1 U13.6 U13.20 U13.21 U18.2 | length 54.8
  Top Layer w0.25: C92.1@47.5,61.85 47.5,62.7 48.585,63.785 U13.6@48.585,64.535 ; U13.6@48.6,64.55 48.627,64.577 48.627,65.183 51.319,67.875 52.881,67.875 55.573,65.183 55.573,64.577 U13.20@55.6,64.55 U13.21@56.1,64.55 56.1,63.3 57.5,61.9 C101.2@57.5,61.85 C102.2@59.5,61.85 v1(68.025,61.85) ; C19.1@82.175,82.54 C57.1@82.175,84.33 83.43,84.33 L2.1@85.225,86.125 ; L2.1@85.725,86.125 85.725,82.9 C60.1@85.75,82.875 ; C110.2@98.95,69.125 C109.2@100.75,69.125 C109.2@100.75,69.175 ; C109.2@100.7,69.075 100.385,68.76 U18.2@100.385,66.539 100.385,65.828 105.648,60.565 HD2.9@107.2,60.565
  Top Layer w0.4: v1(82.7,87.975) 82.866,87.809 83.541,87.809 85.225,86.125 L2.1@85.725,86.125
DAC_1_1: HD2.27 U4.2 | length 11.5
  Top Layer w0.25: U4.2@99.635,44.54 99.635,42.64 104.57,37.705 HD2.27@107.2,37.705
DAC_1_2: HD2.25 U4.3 | length 9.6
  Top Layer w0.25: U4.3@100.135,44.54 100.135,43.29 103.18,40.245 HD2.25@107.2,40.245
DAC_1_3: HD2.23 U4.4 | length 7.7
  Top Layer w0.25: U4.4@100.635,44.54 100.64,44.535 100.64,44.21 102.35,42.5 106.653,42.5 106.938,42.785 HD2.23@107.2,42.785
DAC_1_4: HD2.21 U4.5 | length 7.9
  Top Layer w0.25: U4.5@101.32,45.225 101.32,44.805 102.889,43.236 105.211,43.236 107.2,45.225 HD2.21@107.2,45.325
DAC_1_5: HD2.19 U4.8 | length 8.5
  Top Layer w0.25: U4.8@101.32,46.725 101.598,46.725 101.603,46.73 101.603,48.303 102.625,49.325 105.594,49.325 107.054,47.865 HD2.19@107.2,47.865
DAC_1_6: HD2.17 U4.9 | length 8.4
  Top Layer w0.25: U4.9@100.635,47.41 100.635,48.36 102.68,50.405 HD2.17@107.2,50.405
DAC_1_7: HD2.15 U4.10 | length 11
  Top Layer w0.25: U4.10@100.135,47.41 100.135,50.185 102.895,52.945 HD2.15@107.2,52.945
DAC_1_8: HD2.13 U4.11 | length 14.1
  Top Layer w0.25: U4.11@99.635,47.41 99.635,52.81 102.31,55.485 HD2.13@107.2,55.485
DAC_2_1: HD1.8 U5.2 | length 12.2
  Top Layer w0.25: HD1.8@116.885,63.105 118.495,63.105 124.65,56.95 U5.2@124.65,55.045
DAC_2_2: HD1.10 U5.3 | length 10.3
  Top Layer w0.25: HD1.10@116.885,60.565 119.86,60.565 124.15,56.275 U5.3@124.15,55.045
DAC_2_3: HD1.12 U5.4 | length 8.5
  Top Layer w0.25: HD1.12@116.885,58.025 121.45,58.025 123.645,55.83 123.645,55.05 U5.4@123.65,55.045
DAC_2_4: HD1.14 U5.5 | length 8.5
  Top Layer w0.25: HD1.14@116.885,55.485 117.147,55.485 118.537,56.875 121.63,56.875 122.687,55.818 122.687,54.365 122.692,54.36 U5.5@122.965,54.36
DAC_2_5: HD1.16 U5.8 | length 7.9
  Top Layer w0.25: HD1.16@116.885,52.945 118.667,51.163 121.638,51.163 122.674,52.199 122.674,52.855 122.679,52.86 U5.8@122.965,52.86
DAC_2_6: HD1.18 U5.9 | length 7.7
  Top Layer w0.25: HD1.18@116.885,50.405 122.19,50.405 123.65,51.865 U5.9@123.65,52.175
DAC_2_7: HD1.20 U5.10 | length 9.7
  Top Layer w0.25: HD1.20@116.885,47.865 120.965,47.865 124.15,51.05 U5.10@124.15,52.175
DAC_2_8: HD1.22 U5.11 | length 12.2
  Top Layer w0.25: HD1.22@116.885,45.325 120.6,45.325 124.65,49.375 U5.11@124.65,52.175
DAC_3_1: HD1.26 U6.2 | length 11.5
  Top Layer w0.25: HD1.26@116.885,40.245 119.43,40.245 124.685,34.99 U6.2@124.685,33.51
DAC_3_2: HD1.28 U6.3 | length 9.6
  Top Layer w0.25: HD1.28@116.885,37.705 120.945,37.705 124.18,34.47 124.18,33.515 U6.3@124.185,33.51
DAC_3_3: HD1.30 U6.4 | length 8
  Top Layer w0.25: HD1.30@116.885,35.165 117.147,35.165 117.457,35.475 122.125,35.475 123.68,33.92 123.68,33.515 U6.4@123.685,33.51
DAC_3_4: HD1.32 U6.5 | length 8.3
  Top Layer w0.25: HD1.32@116.885,32.625 118.824,34.564 122.116,34.564 122.75,33.93 122.75,32.83 122.755,32.825 U6.5@123,32.825
DAC_3_5: HD1.34 U6.8 | length 8.2
  Top Layer w0.25: HD1.34@116.885,30.085 118.37,28.6 120.625,28.6 122.685,30.66 122.685,31.32 122.69,31.325 U6.8@123,31.325
DAC_3_6: HD1.36 U6.9 | length 8.3
  Top Layer w0.25: HD1.36@116.885,27.545 120.9,27.545 123.685,30.33 U6.9@123.685,30.64
DAC_3_7: HD1.38 U6.10 | length 10.6
  Top Layer w0.25: HD1.38@116.885,25.005 120.205,25.005 124.185,28.985 U6.10@124.185,30.64
DAC_3_8: HD1.40 U6.11 | length 13.8
  Top Layer w0.25: HD1.40@116.885,22.465 121.04,22.465 124.685,26.11 U6.11@124.685,30.64
DAC_4_1: C65.2 HD1.7 R11.2 | length 18.3
  Top Layer w0.25: HD1.7@132.125,63.105 145.745,63.105 146.8,62.05 C65.2@146.8,60.725 146.725,60.65 R11.2@146.725,58.865
DAC_4_1r: R11.1 U7.2 | length 2.3
  Top Layer w0.25: U7.2@145.35,55.695 145.355,55.7 145.355,56.13 146.165,56.94 146.38,56.94 R11.1@146.725,57.285
DAC_4_2: C66.2 HD1.9 R12.2 | length 16.1
  Top Layer w0.25: HD1.9@132.125,60.565 133.685,62.125 143.83,62.125 145.05,60.905 C66.2@145.05,60.725 145.125,60.65 R12.2@145.125,58.865
DAC_4_2r: R12.1 U7.3 | length 1.7
  Top Layer w0.25: U7.3@144.85,55.695 144.85,57.01 R12.1@145.125,57.285
DAC_4_3: C67.2 HD1.11 R13.2 | length 13.2
  Top Layer w0.25: HD1.11@132.125,58.025 134.275,60.175 140.6,60.175 141.17,59.605 141.17,59.155 C67.2@141.6,58.725 141.74,58.865 R13.2@143.5,58.865
DAC_4_3r: R13.1 U7.4 | length 2
  Top Layer w0.25: R13.1@143.5,57.285 143.54,57.285 144.35,56.475 U7.4@144.35,55.695
DAC_4_4: C68.2 HD1.13 R14.2 | length 8.5
  Top Layer w0.25: HD1.13@132.125,55.485 133.44,56.8 C68.2@138.275,56.8 140.085,56.8 R14.2@140.11,56.825
DAC_4_4r: R14.1 U7.5 | length 3
  Top Layer w0.25: R14.1@141.69,56.825 141.948,56.567 142.483,56.567 143.5,55.55 143.5,55.015 143.505,55.01 U7.5@143.665,55.01
DAC_4_5: C69.2 HD1.15 R15.2 | length 8.7
  Top Layer w0.25: HD1.15@132.125,52.945 133.67,51.4 C69.2@138.3,51.4 R15.2@140.16,51.4
DAC_4_5r: R15.1 U7.8 | length 3.1
  Top Layer w0.25: R15.1@141.74,51.4 141.74,51.44 143.35,53.05 143.35,53.505 143.355,53.51 U7.8@143.665,53.51
DAC_4_6: C70.2 HD1.17 R16.2 | length 14.3
  Top Layer w0.25: HD1.17@132.125,50.405 133.492,49.038 142.142,49.038 143.225,47.955 C70.2@143.225,47.775 143.525,48.075 R16.2@143.525,49.635
DAC_4_6r: R16.1 U7.9 | length 2
  Top Layer w0.25: R16.1@143.525,51.215 143.565,51.215 144.35,52 U7.9@144.35,52.825
DAC_4_7: C71.2 HD1.19 R17.2 | length 17.1
  Top Layer w0.25: HD1.19@132.125,47.865 134.24,45.75 144.075,45.75 145,46.675 C71.2@145,47.75 145.175,47.925 R17.2@145.175,49.61
DAC_4_7r: R17.1 U7.10 | length 1.8
  Top Layer w0.25: U7.10@144.85,52.825 144.85,51.515 R17.1@145.175,51.19
DAC_4_8: C72.2 HD1.21 R18.2 | length 21.4
  Top Layer w0.25: HD1.21@132.125,45.325 132.331,45.325 132.756,44.9 147,44.9 148.725,46.625 C72.2@148.725,47.525 148.545,47.525 148.115,47.955 148.115,48.135 147.21,49.04 147.21,49.265 146.865,49.61 R18.2@146.825,49.61
DAC_4_8r: R18.1 U7.11 | length 2.4
  Top Layer w0.25: U7.11@145.35,52.825 145.355,52.82 145.355,52.37 146.19,51.535 146.48,51.535 R18.1@146.825,51.19
DAC_5_1: C81.2 HD1.25 R19.2 | length 15.9
  Top Layer w0.25: HD1.25@132.125,40.245 142.96,40.245 145.025,38.18 C81.2@145.025,38 144.925,37.9 R19.2@144.925,36.115
DAC_5_1r: R19.1 U8.2 | length 2.2
  Top Layer w0.25: U8.2@143.64,32.985 143.645,32.99 143.645,33.47 144.365,34.19 144.58,34.19 R19.1@144.925,34.535
DAC_5_2: C82.2 HD1.27 R20.2 | length 14.3
  Top Layer w0.25: HD1.27@132.125,37.705 132.125,37.775 133.525,39.175 142.28,39.175 143.275,38.18 C82.2@143.275,38 143.325,37.95 R20.2@143.325,36.115
DAC_5_2r: R20.1 U8.3 | length 1.6
  Top Layer w0.25: U8.3@143.14,32.985 143.14,34.35 R20.1@143.325,34.535
DAC_5_3: C83.2 HD1.29 R21.2 | length 11.4
  Top Layer w0.25: HD1.29@132.125,35.165 134.61,37.65 138.2,37.65 C83.2@139.9,35.95 141.535,35.95 R21.2@141.7,36.115
DAC_5_3r: R21.1 U8.4 | length 2
  Top Layer w0.25: R21.1@141.7,34.535 141.74,34.535 142.635,33.64 142.635,32.99 U8.4@142.64,32.985
DAC_5_4: C84.2 HD1.31 R22.2 | length 6.9
  Top Layer w0.25: HD1.31@132.125,32.625 133.45,33.95 C84.2@136.625,33.95 138.285,33.95 R22.2@138.41,34.075
DAC_5_4r: R22.1 U8.5 | length 3.1
  Top Layer w0.25: R22.1@139.99,34.075 139.99,34.035 140.335,33.69 140.865,33.69 141.672,32.883 141.672,32.305 141.677,32.3 U8.5@141.955,32.3
DAC_5_5: C85.2 HD1.33 R23.2 | length 7
  Top Layer w0.25: HD1.33@132.125,30.085 133.61,28.6 C85.2@136.625,28.6 R23.2@138.46,28.6
DAC_5_5r: R23.1 U8.8 | length 3.2
  Top Layer w0.25: R23.1@140.04,28.6 140.04,28.64 141.672,30.272 141.672,30.795 141.677,30.8 U8.8@141.955,30.8
DAC_5_6: C86.2 HD1.35 R24.2 | length 12.4
  Top Layer w0.25: HD1.35@132.125,27.545 133.557,26.113 140.442,26.113 141.35,25.205 C86.2@141.35,25.025 141.35,26.565 141.695,26.91 R24.2@141.7,26.91
DAC_5_6r: R24.1 U8.9 | length 2
  Top Layer w0.25: R24.1@141.7,28.49 141.74,28.49 142.635,29.385 142.635,30.11 U8.9@142.64,30.115
DAC_5_7: C87.2 HD1.37 R25.2 | length 14.4
  Top Layer w0.25: HD1.37@132.125,25.005 133.78,23.35 141.655,23.35 143.15,24.845 C87.2@143.15,25.025 143.325,25.2 R25.2@143.325,26.885
DAC_5_7r: R25.1 U8.10 | length 1.7
  Top Layer w0.25: U8.10@143.14,30.115 143.14,28.65 R25.1@143.325,28.465
DAC_5_8: C88.2 HD1.39 R26.2 | length 19.2
  Top Layer w0.25: HD1.39@132.125,22.465 144.715,22.465 146.836,24.586 146.836,25.461 C88.2@146.925,25.55 146.925,25.73 146.115,26.54 145.295,26.54 R26.2@144.95,26.885
DAC_5_8r: R26.1 U8.11 | length 2.3
  Top Layer w0.25: U8.11@143.64,30.115 143.645,30.11 143.645,29.605 144.44,28.81 144.605,28.81 R26.1@144.95,28.465
DAC_CSN: JP_DAC_4.2 U4.12 U5.12 U6.12 U7.12 U8.12 | length 205.3
  Top Layer w0.25: v1(97.05,49.55) 97.305,49.55 99.135,47.72 U4.12@99.135,47.41 ; U5.12@125.15,52.175 125.15,51.865 126.04,50.975 v1(126.075,50.975) ; U6.12@125.185,30.64 125.185,30.33 126.09,29.425 v1(126.1,29.425) ; U8.12@144.14,30.115 144.14,30.245 144.145,30.25 145.3,30.25 146.825,28.725 v1(146.825,27.425) ; U7.12@145.85,52.825 146.6,52.825 148.625,50.8 v1(148.8,50.8)
  Bottom Layer w0.25: JP_DAC_4.2@54.1,92.79 54.1,91.693 54.825,90.942 cw(c54.1,90.25) 54.852,90.912 55.873,89.752 55.946,89.679 56.85,88.775 75.325,88.775 97.025,67.075 97.025,49.575 v1(97.05,49.55) 94.1,49.55 92.875,48.325 92.875,45.05 95.675,42.25 98.384,42.25 99.259,41.375 120.425,41.375 ; v1(126.075,50.975) 126.169,50.975 126.731,51.537 128.317,51.537 128.837,51.017 128.837,49.912 120.425,41.5 120.425,41.375 ; 131.8,28.4 127.125,28.4 v1(126.1,29.425) 126.1,29.701 125.8,30.001 125.8,36 120.425,41.375 ; v1(146.825,27.425) 145.818,28.432 131.832,28.432 133.35,29.95 133.35,35.075 146.411,48.136 148.8,50.525 v1(148.8,50.8)
DAC_SCK: JP_DAC_2.2 U4.13 U5.13 U6.13 U7.13 U8.13 | length 228.6
  Top Layer w0.25: v1(97.15,47.925) 97.345,47.73 97.345,47.33 97.945,46.73 98.445,46.73 U4.13@98.45,46.725 ; U5.13@125.835,52.86 126.145,52.86 127.755,51.25 127.755,50.845 v1(127.95,50.65) ; U6.13@125.87,31.325 125.875,31.32 126.33,31.32 v1(127.975,29.675) ; U8.13@144.825,30.8 144.828,30.797 145.403,30.797 147.125,29.075 148.7,29.075 v1(148.825,28.95) ; U7.13@146.535,53.51 146.845,53.51 148.518,51.837 150.238,51.837 v1(150.975,51.1)
  Bottom Layer w0.25: JP_DAC_2.2@56.875,92.79 58.19,91.475 73.925,91.475 98.275,67.125 98.275,48.8 97.4,47.925 v1(97.15,47.925) 96.263,48.812 94.058,48.812 93.252,48.006 93.252,45.206 94.858,43.6 106.797,43.6 106.843,43.647 117.242,43.647 117.263,43.625 120.925,43.625 127.35,50.05 ; v1(127.95,50.65) 127.35,50.05 ; v1(148.825,28.95) 147.35,28.95 146.75,29.55 146.75,46.875 v1(150.975,51.1) 150.869,51.1 150.282,51.687 148.433,51.687 147.913,51.167 147.913,51.163 132.777,36.027 131.768,36.027 130.825,35.083 130.825,29.65 130.325,29.15 128.631,29.15 128.106,29.675 v1(127.975,29.675) 127.78,29.87 127.38,29.87 126.593,30.657 126.593,46.393 129.248,49.048 129.248,51.202 128.536,51.914 125.76,51.914 125.188,51.342 125.188,50.608 125.746,50.05 127.35,50.05
DAC_SDI: JP_DAC_3.2 U4.14 | length 77.5
  Top Layer w0.25: v1(95.65,47.9) 95.921,47.9 97.596,46.225 U4.14@98.45,46.225
  Bottom Layer w0.25: JP_DAC_3.2@59.65,92.815 74.11,92.815 98.975,67.95 98.975,47.925 97.825,46.775 96.7,46.775 95.65,47.825 v1(95.65,47.9)
DAQ_AI0: HD0.38 JP6.2 | length 13.6
  Top Layer w0.25: HD0.38@20.335,25.005 21.633,26.303 21.633,33.708 22.55,34.625 23.825,34.625 24.579,33.871 24.579,33.661 24.9,33.34 JP6.2@24.9,33.3
DAQ_AI0B: B0.68 JP6.3 R66.1 | length 53.6
  Top Layer w0.25: B0.68@-16.057,34.895 -17.05,35.888 -17.05,37.732 -15.72,39.063 -15.679,39.063 -14.767,39.975 -13.775,39.975 -12.375,38.575 -11.762,38.575 -10.72,39.617 -9.964,39.617 -9.73,39.383 20.437,39.383 26.48,33.34 JP6.3@26.48,33.3 26.795,32.985 26.795,32.605 27.19,32.21 27.19,31.8 R66.1@27.49,31.5
DAQ_AI0bi: JP6.1 U10.3 | length 8
  Top Layer w0.25: JP6.1@23.32,33.3 23.32,33.26 24.418,32.162 24.418,27.777 25.325,26.87 U10.3@26.036,26.87
DAQ_AI1: HD0.40 JP7.2 | length 3.7
  Top Layer w0.25: HD0.40@20.335,22.465 21.5,21.3 JP7.2@23.6,21.3
DAQ_AI1B: B0.33 JP7.3 R69.1 | length 43.5
  Top Layer w0.25: B0.33@-10.342,36.165 -10.146,35.969 -10.146,35.246 -3.684,28.784 12.741,28.784 21.805,19.72 JP7.3@23.6,19.72 23.78,19.9 R69.1@25.81,19.9
DAQ_AI1in: JP7.1 U10.5 | length 3
  Top Layer w0.25: JP7.1@23.6,22.88 23.64,22.88 24.936,24.176 25.882,24.176 U10.5@26.036,24.33
DAQ_AI2: HD0.39 JP8.2 | length 2.8
  Top Layer w0.25: JP8.2@33.2,21.38 34.49,21.38 HD0.39@35.575,22.465
DAQ_AI2B: B0.65 JP8.3 R68.2 | length 65.2
  Top Layer w0.25: B0.65@-14.152,38.705 -13.947,38.5 -13.947,37.224 -13.801,37.077 -13.774,37.077 -13.24,36.543 -13.24,35.787 -13.774,35.253 -13.801,35.253 -13.947,35.106 -13.947,31.522 1.175,16.4 29.76,16.4 JP8.3@33.16,19.8 ; R68.2@30.69,19.9 33.1,19.9 33.18,19.82 JP8.3@33.2,19.8
DAQ_AI2in: JP8.1 U10.10 | length 2.8
  Top Layer w0.25: U10.10@30.964,24.33 31.118,24.176 31.944,24.176 33.16,22.96 JP8.1@33.2,22.96
DAQ_AI3: HD0.37 JP10.2 | length 13.9
  Top Layer w0.25: JP10.2@29.7,33.3 30.045,33.645 30.045,33.92 30.525,34.4 32.175,34.4 33.622,32.953 33.622,26.958 HD0.37@35.575,25.005
DAQ_AI3B: B0.30 JP10.3 R67.2 | length 50.6
  Top Layer w0.25: B0.30@-12.247,39.975 -12.222,40 -6.05,40 -4.325,41.725 21.031,41.725 28.978,33.778 28.978,32.686 29.378,32.285 30.045,32.285 R67.2@30.79,31.54 ; R67.2@30.79,31.5 R67.2@30.79,31.54 ; JP10.3@31.28,33.3 31.28,32.03 R67.2@30.79,31.54
DAQ_AI3in: JP10.1 U10.12 | length 8.3
  Top Layer w0.25: JP10.1@28.12,33.3 28.3,33.12 28.3,28.275 29.705,26.87 U10.12@30.964,26.87
DAQ_AI4: B0.28 HD0.33 | length 69
  Bottom Layer w0.254: B0.28@-12.247,42.515 -12.247,41.268 -11.333,40.354 -11.333,31.308 -3.65,23.625 3.479,23.625 6.104,26.25 17.869,26.25 19.977,24.141 33.393,24.141 36.439,27.187 36.439,29.221 HD0.33@35.575,30.085
DAQ_AI5: B0.60 HD0.34 | length 50.2
  Bottom Layer w0.254: B0.60@-16.057,45.055 -16.971,45.969 -16.971,47.974 -16.42,48.525 -15.6,48.525 -14.725,47.65 -13.525,47.65 -12.45,48.725 -11.775,48.725 -10.721,49.779 -9.929,49.779 -4.18,44.03 -3.099,44.03 -3.095,44.025 -1.094,44.025 8.956,33.975 16.445,33.975 HD0.34@20.335,30.085
DAQ_AI6: B0.25 HD0.31 | length 54.8
  Bottom Layer w0.254: B0.25@-10.342,46.325 -7.396,46.325 -4.72,43.649 -3.257,43.649 -3.253,43.644 -2.175,43.644 10.119,31.35 14.121,31.35 16.721,28.75 23.609,28.75 27.484,32.625 HD0.31@35.575,32.625
DAQ_AI7: B0.57 HD0.32 | length 44.7
  Bottom Layer w0.254: B0.57@-14.152,48.865 -13.948,49.069 -13.948,49.727 -12.296,51.38 -11.71,51.38 -10.771,52.319 -9.963,52.319 -9.428,51.784 -9.428,51.428 -4.6,46.6 0.729,46.6 11.154,36.175 16.785,36.175 HD0.32@20.335,32.625
DAQ_AI8: B0.34 HD3.40 | length 16
  Bottom Layer w0.25: B0.34@-12.247,34.895 -12.247,31.097 HD3.40@-3.615,22.465
DAQ_AI9: B0.66 HD3.39 | length 42.9
  Bottom Layer w0.254: B0.66@-16.057,37.435 -16.09,37.435 -17.375,36.15 -17.375,28.453 -9.072,20.15 9.31,20.15 HD3.39@11.625,22.465
DAQ_AI10: B0.31 HD3.38 | length 16.5
  Bottom Layer w0.25: B0.31@-10.342,38.705 -9,37.363 -9,30.39 HD3.38@-3.615,25.005
DAQ_AI11: B0.63 HD3.37 | length 41.7
  Bottom Layer w0.254: B0.63@-14.152,41.245 -15.066,40.331 -15.066,32.695 -3.973,21.601 8.301,21.601 11.625,24.925 HD3.37@11.625,25.005
DAQ_AI12: B0.61 HD3.36 | length 22.3
  Bottom Layer w0.25: B0.61@-14.152,43.785 -14.133,43.766 -12.146,43.766 -10.605,42.225 -9.725,42.225 -6.882,39.382 -6.882,30.812 HD3.36@-3.615,27.545
DAQ_AI13: B0.26 HD3.35 | length 31.1
  Bottom Layer w0.254: B0.26@-12.247,45.055 -12.222,45.03 -9.556,45.03 -5.626,41.1 -3.981,41.1 -3.973,41.109 -3.257,41.109 -2.751,40.603 -2.751,40.576 10.095,27.73 11.44,27.73 HD3.35@11.625,27.545
DAQ_AI14: B0.58 HD3.34 | length 24.4
  Bottom Layer w0.25: B0.58@-16.057,47.595 -15.852,47.39 -15.852,46.735 -14.53,45.413 -14.489,45.413 -13.219,44.143 -11.99,44.143 -10.72,42.873 -8.973,42.873 -6.1,40 -6.1,33.425 -3.615,30.94 HD3.34@-3.615,30.085
DAQ_AI15: B0.23 HD3.33 | length 32.7
  Bottom Layer w0.254: B0.23@-10.342,48.865 -11.256,47.951 -11.256,45.946 -10.721,45.411 -7.861,45.411 -4.371,41.921 -2.296,41.921 9.483,30.142 11.568,30.142 HD3.33@11.625,30.085
DAQ_AIGND0: B0.24 B0.27 B0.29 B0.32 B0.56 B0.59 B0.64 B0.67 HD0.29 HD0.35 HD0.36 HD3.31 HD3.32 L4.2 | length 92.7
  Top Layer w0.25: B0.64@-16.057,39.975 -16.969,40.887 -16.969,46.325 ; B0.56@-16.057,50.135 -16.057,48.885 -16.969,47.973 -16.969,46.325 ; B0.59@-13.909,46.008 -14.019,45.898 -14.019,45.494 -12.31,43.785 B0.27@-10.342,43.785 B0.29@-10.342,41.245 ; B0.32@-12.247,37.435 -12.228,37.416 -8.406,37.416 HD3.32@-3.615,32.625 ; B0.24@-12.247,47.595 -12.452,47.39 -12.835,47.39 -13.9,46.325 -16.969,46.325 ; HD3.31@11.625,32.625 15.255,32.625 HD0.36@20.335,27.545 ; HD0.35@35.575,27.545 34.713,28.407 34.713,34.303 HD0.29@35.575,35.165
  Top Layer w0.254: HD3.32@-3.615,32.625 0.075,32.625 L4.2@0.1,32.6 0.1,32.1 1.354,30.846 9.846,30.846 HD3.31@11.625,32.625
  MidLayer2 w0.25: B0.64@-16.057,39.975 -15.873,39.791 -15.873,38.838 -14.336,37.302 -14.336,36.349 B0.67@-14.152,36.165 -13.86,36.165 -12.59,37.435 B0.32@-12.247,37.435
  Bottom Layer w0.25: HD0.36@20.335,27.545 HD0.35@35.575,27.545
DAQ_AISENSE0: B0.62 HD0.30 | length 105.3
  Bottom Layer w0.254: B0.62@-16.057,42.515 -18.125,40.447 -18.125,28.2 -6.738,16.813 31.145,16.813 37.425,23.094 37.425,31.996 34.256,35.165 HD0.30@20.335,35.165